# Altium PCB schematic.PcbDoc
Units mil, origin at the board's own origin, x right, y up, seen from the top; angles counter-clockwise.
Board outline 2165.35 x 2362.2 mil, 2 copper layers (Top, Bottom); 42 components, 51 nets, 206 pads, 238 vias.
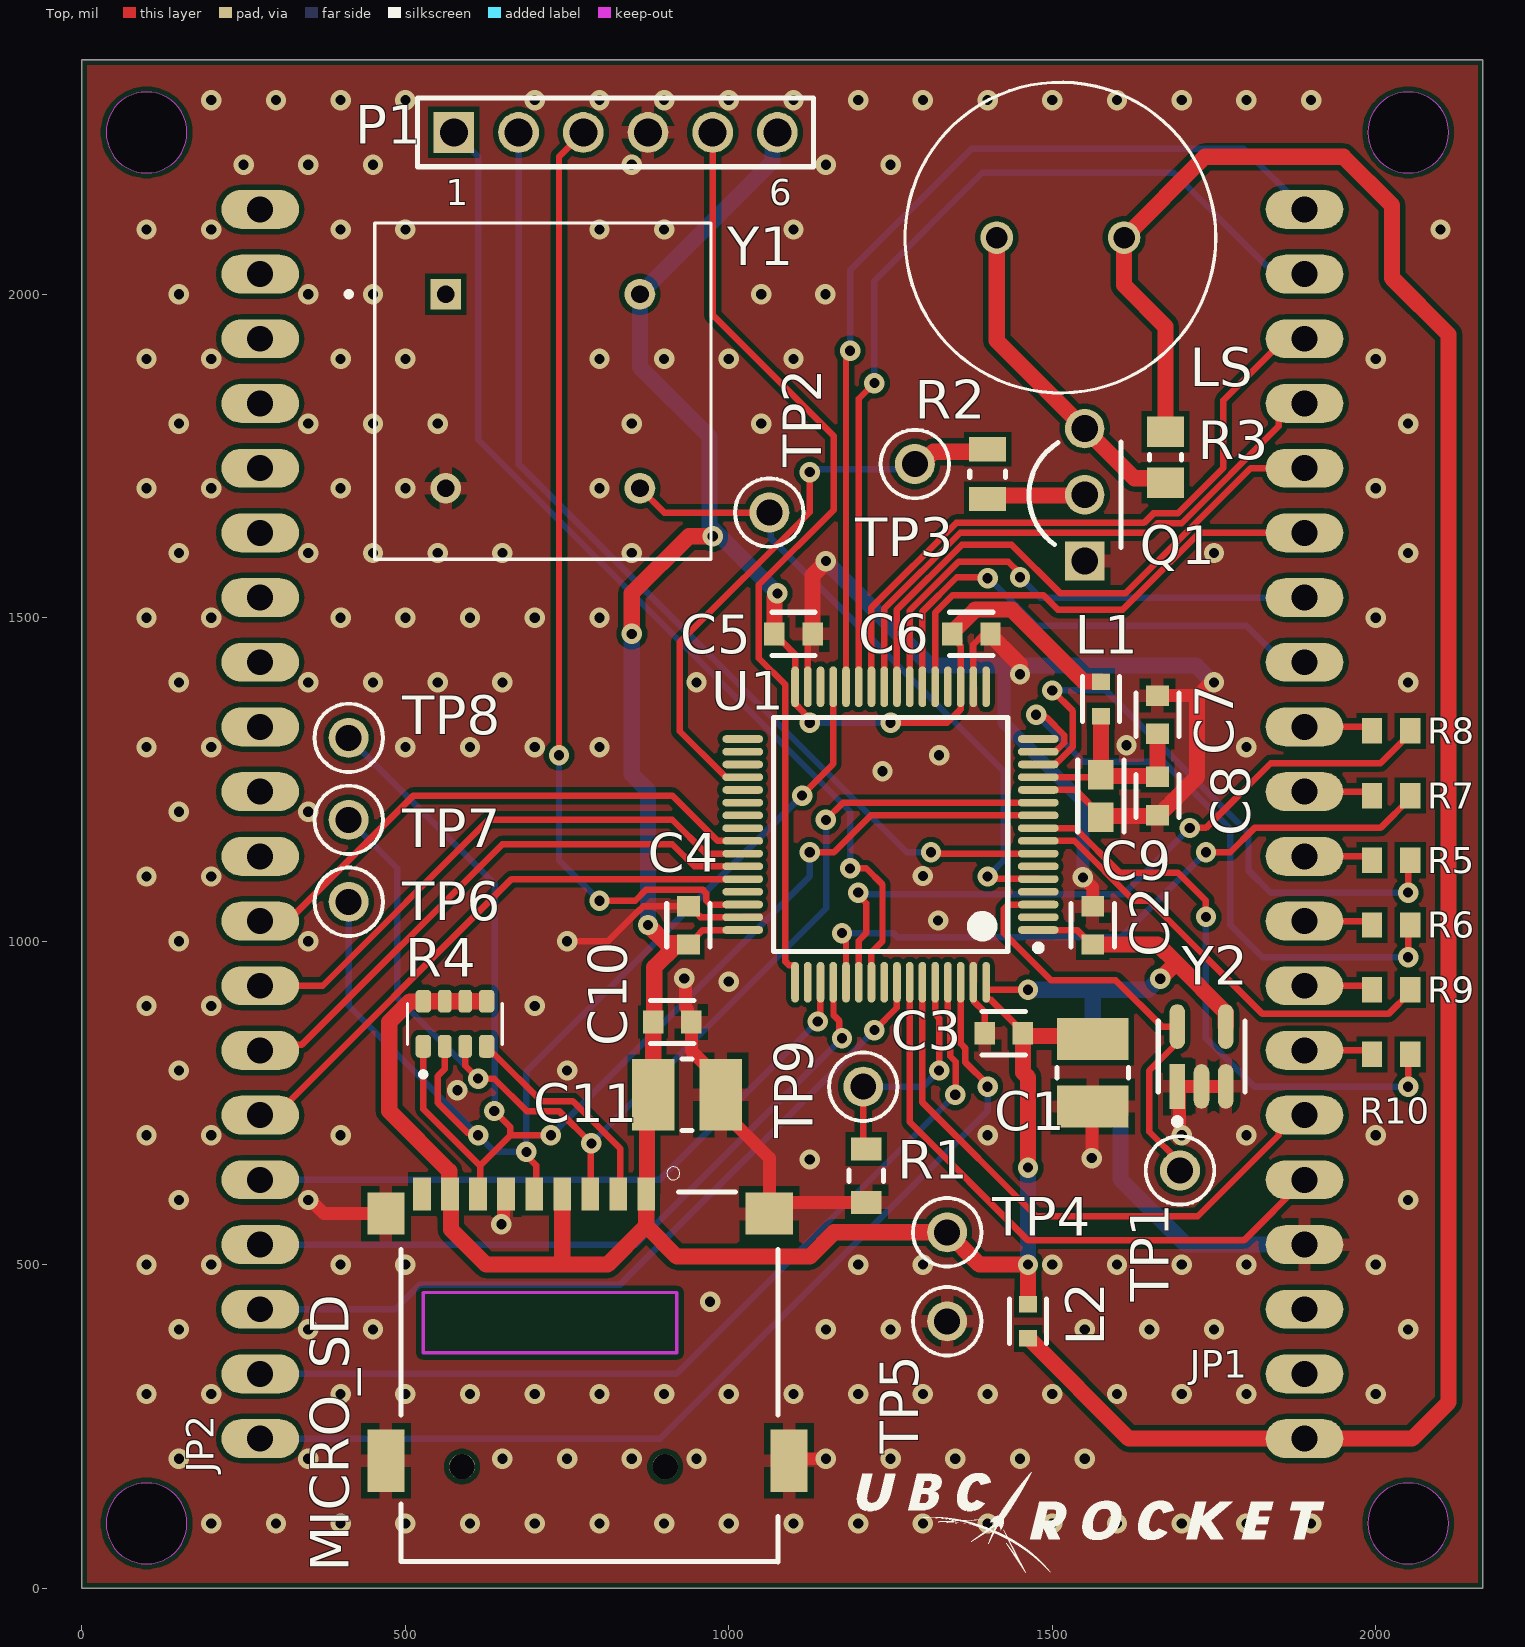
[diagram p0: Top view]
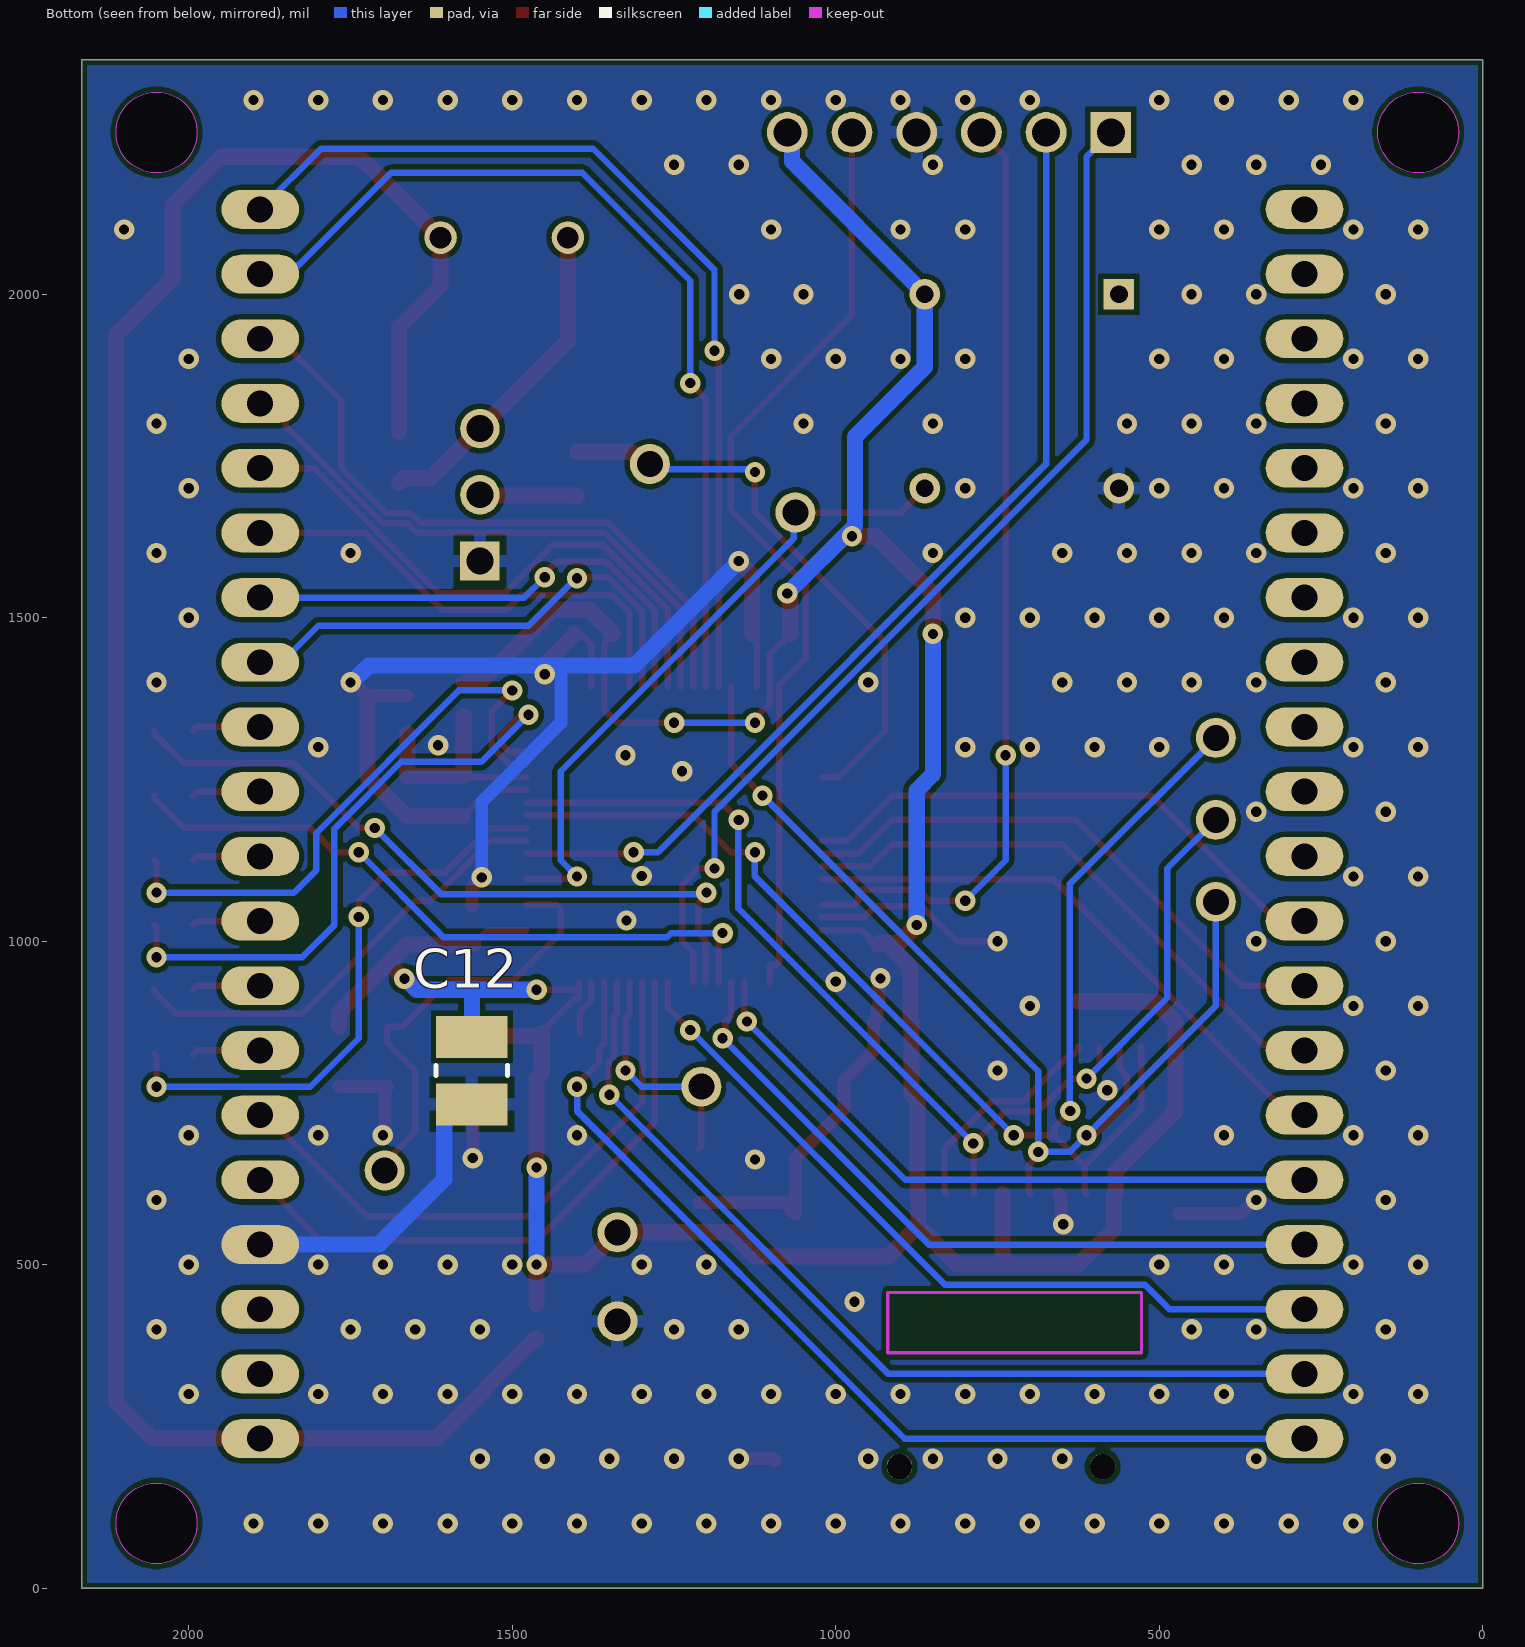
[diagram p1: Bottom view, seen from below]
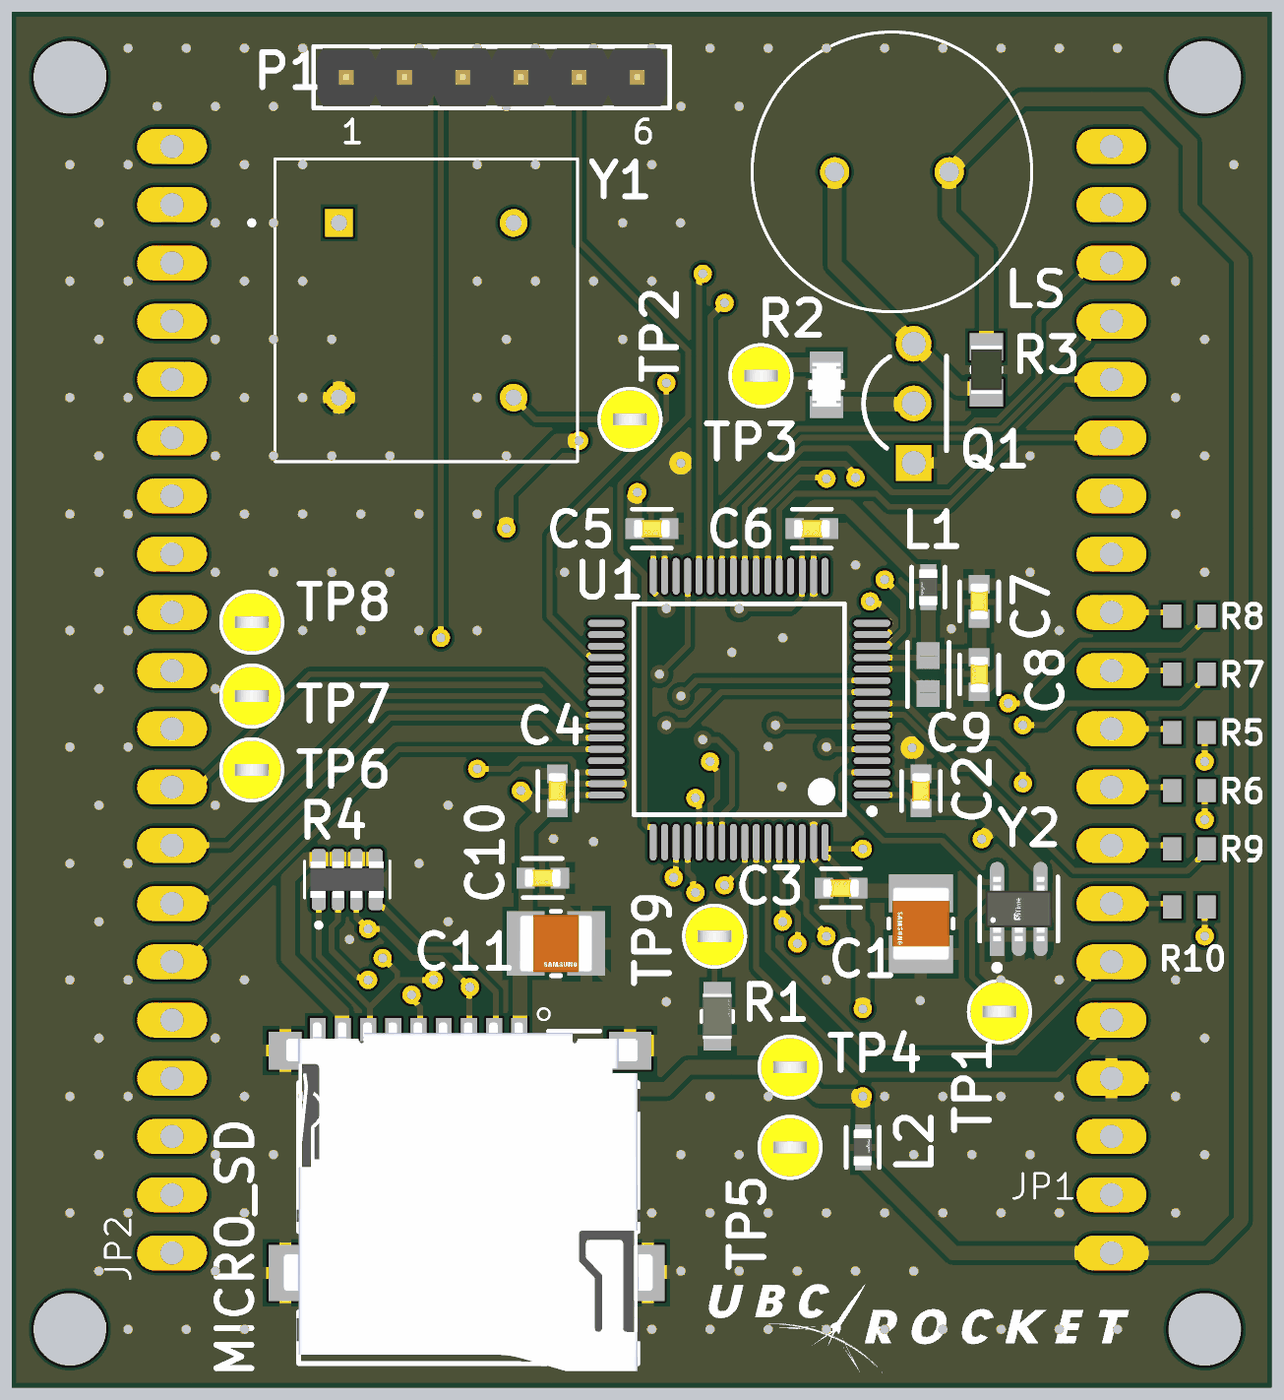
[diagram p2: 3D render of the assembled board from above, using the file's embedded part models]

## Layer stack, top to bottom
Top Solder: solder mask 0.4, Solder Resist, Dk 3.5
Top: signal copper 1.378
Dielectric 1: dielectric 12.6, FR-4, Dk 4.8
Bottom: signal copper 1.378
Bottom Solder: solder mask 0.4, Solder Resist, Dk 3.5

## Board outline
0,2362.2 0,0 2165.35,0 2165.35,2362.2
cut-out: 2050,2187.5 ccw(c2050,2250) 2112.5,2250 ccw(c2050,2250) 2050,2312.5 ccw(c2050,2250) 1987.5,2250 ccw(c2050,2250)
cut-out: 100,2187.5 ccw(c100,2250) 162.5,2250 ccw(c100,2250) 100,2312.5 ccw(c100,2250) 37.5,2250 ccw(c100,2250)
cut-out: 100,37.5 ccw(c100,100) 162.5,100 ccw(c100,100) 100,162.5 ccw(c100,100) 37.5,100 ccw(c100,100)
cut-out: 2050,37.5 ccw(c2050,100) 2112.5,100 ccw(c2050,100) 2050,162.5 ccw(c2050,100) 1987.5,100 ccw(c2050,100)

## Design rules (kind name [scope] priority, off if disabled: settings)
BoardOutlineClearance [All] p1: gap=7.87 ignorepadtopadclearanceinfootprint=FALSE except(15.75: Arc-SplitBarrior Arc-SplitContinuation Track-SplitBarrior Track-SplitContinuation SMDPad-SplitBarrior SMDPad-SplitContinuation THPad-SplitBarrior THPad-SplitContinuation Via-SplitBarrior Via-SplitContinuation Fill-SplitBarrior Fill-SplitContinuation Poly-SplitBarrior Poly-SplitContinuation Region-SplitBarrior Region-SplitContinuation Text-SplitBarrior Text-SplitContinuation)
Clearance "Clearance Bottom Layer" [OnLayer('Bottom Layer')] p1: gap=8 ignorepadtopadclearanceinfootprint=TRUE except(10: Arc-Text Track-Text SMDPad-Text THPad-Text Via-Text Fill-Text Poly-Text Region-Text Text-Text)
Clearance "Clearance Top Layer" [OnLayer('Top Layer')] p2: gap=8 ignorepadtopadclearanceinfootprint=TRUE except(10: Arc-Text Track-Text SMDPad-Text THPad-Text Via-Text Fill-Text Poly-Text Region-Text Text-Text)
Clearance [All] p3: gap=7.87 ignorepadtopadclearanceinfootprint=FALSE except(3.5: Arc-Arc Arc-Track Arc-SMDPad Track-Track Track-SMDPad SMDPad-SMDPad; 5: Arc-Via Track-Via SMDPad-Via THPad-Via Via-Via; 10: Arc-Text Track-Text SMDPad-Text THPad-Text Via-Text Fill-Text Poly-Text Region-Text Text-Text)
HoleSize [All] p1: absolutevalues=TRUE maxlimit=248.03 minlimit=7.87 maxpercent=80.000 minpercent=20.000
MinimumAnnularRing [All] p1: minimumring=3
MinimumSolderMaskSliver [All] p1: minsoldermaskwidth=3.94
PolygonConnect PolygonConnect_1 [All] p1: thpad.connectstyle=Relief thpad.reliefconductorwidth=20 thpad.reliefentries=4 thpad.polygonreliefangle="90 Angle" thpad.airgapwidth=10 smdpad.connectstyle=Relief smdpad.reliefconductorwidth=20 smdpad.reliefentries=4 smdpad.polygonreliefangle="90 Angle" smdpad.airgapwidth=10 via.connectstyle=Direct via.reliefconductorwidth=20 via.reliefentries=4 via.polygonreliefangle="90 Angle" via.airgapwidth=10
RoutingCorners [All] p1: cornerstyle=Round minsetback=100 maxsetback=100
RoutingVias [All] p1: holewidth=19.68 width=39.37 viastyle="Through Hole" minholewidth=7.87 minwidth=17.72 maxholewidth=39.37 maxwidth=78.74
SilkToSilkClearance [All] p1: silktosilkclearance=3.94
SilkToSolderMaskClearance [IsPad] p1: minsilkscreentomaskgap=3.94 clearancetoexposedcopper=TRUE
SolderMaskExpansion [All] p1: expansion=4 istentingtop=FALSE
Width [All] p1: maxlimit=100 minlimit=3.5 preferedwidth=15
25 further rules are at their usual default settings.

## Classes and differential pairs
component class microSD: C10 C11 MICRO_SD R4 TP6 TP7 TP8
component class schematic: JP1 JP2 L2
component class MCU: 30mil C1 C2 C3 C4 C5 C6 C7 C8 C9 C12 L1 LS P1 Q1 R1 R2 R3 R5 R6 R7 R8 R9 R10 TP1 TP2 TP3 TP4 TP5 TP9 U1 Y1 Y2

## Components (designator, comment, footprint, x,y, rotation, side; value= is the part's Value field where it differs from the comment)
C1 "CL32B106KAJNNNE" FP-CL32-IPC_B 1562.5,796.6 r270 top
C2 "CC0603KRX7R9BB104" FP-CC0603-DA-MFG 1562.5,1024.42 r90 top value="100 nF"
C3 "CC0603KRX7R9BB104" FP-CC0603-DA-MFG 1425,857.69 r180 top value="100 nF"
C4 "CC0603KRX7R9BB104" FP-CC0603-DA-MFG 937.5,1024.42 r90 top value="100 nF"
C5 "CC0603KRX7R9BB104" FP-CC0603-DA-MFG 1100,1475 r0 top value="100 nF"
C6 "CC0603KRX7R9BB104" FP-CC0603-DA-MFG 1375,1475 r0 top value="100 nF"
C7 "CC0603KRX7R9BB104" FP-CC0603-DA-MFG 1662.5,1350 r90 top value="100 nF"
C8 "CC0603KRX7R9BB103" FP-CC0603-DA-MFG 1662.5,1224.42 r270 top value="10 nF"
C9 "CL10A105KO8NNNC" FP-CL10-IPC_A 1575,1224.42 r270 top
C10 "CC0603KRX7R9BB104" FP-CC0603-DA-MFG 912.5,875 r0 top value="100 nF"
C11 "CL32B106KAJNNNE" FP-CL32-IPC_B 935.33,762.5 r0 top
C12 "CL32B106KAJNNNE" FP-CL32-IPC_B 1562.5,800 r270 bottom
JP1 "PINHD-1X20" 1X20 1889.76,1181.1 r90 top
JP2 "PINHD-1X20" 1X20 275.59,1181.1 r90 top
L1 "BLM18EG601SN1D" FP-BLM18-0_15-t0_8-MFG 1575,1374.42 r270 top
L2 "BLM18EG601SN1D" FP-BLM18-0_15-t0_8-MFG 1462.5,412.5 r90 top
LS "PS1240P02BT" XDCR_PS1240P02BT 1512.5,2087.5 r0 top
MICRO_SD "TF-01A" TF-01A 784.56,326.77 r0 top
P1 "61300611121" 61300611121 825,2250 r0 top
Q1 "PN2222ATF" FAIR-TO-92-3 1550,1689.98 r90 top
R1 "AC0805FR-0710KL" FP-AC0805-MFG 1212.5,637.5 r90 top value=10KΩ
R2 "CRCW0805220RFKEA" FP-CRCW0805-e3-MFG 1400,1721.95 r270 top
R3 "RC0805FR-071KL" RESC2013X60X35ML10T20 1675,1747.84 r90 top
R4 "YC164-JR-0747KL" RESCAXE80P320X160X70-8N 576.67,872.34 r90 top
R5 "RC0603JR-070RL" RESC1608X55X25ML10T15 2023.67,1125 r0 top
R6 "RC0603JR-070RL" RESC1608X55X25ML10T15 2023.67,1025 r0 top
R7 "RC0603JR-070RL" RESC1608X55X25ML10T15 2023.67,1225 r0 top
R8 "RC0603JR-070RL" RESC1608X55X25ML10T15 2023.67,1325 r180 top
R9 "RC0603JR-070RL" RESC1608X55X25ML10T15 2023.67,925 r0 top
R10 "RC0603JR-070RL" RESC1608X55X25ML10T15 2023.67,825 r0 top
TP1 "5004" FP-5004-MFG 1697.32,645.57 r0 top
TP2 "5004" FP-5004-MFG 1062.5,1662.5 r0 top
TP3 "5004" FP-5004-MFG 1287.5,1737.5 r0 top
TP4 "5004" FP-5004-MFG 1337.5,550 r0 top
TP5 "5004" FP-5004-MFG 1337.5,412.5 r0 top
TP6 "5004" FP-5004-MFG 412.5,1060.84 r0 top
TP7 "5004" FP-5004-MFG 412.5,1187.5 r0 top
TP8 "5004" FP-5004-MFG 412.5,1314.16 r0 top
TP9 "5004" FP-5004-MFG 1207.77,775 r0 top
U1 "STM32L476RCT6" STM-LQFP64_L 1250,1164.86 r180 top
Y1 "ACHL-8.000MHZ-EK" XTAL_ACHL-8.000MHZ-EK 712.5,1850 r0 top
Y2 "SIT1630AI-S4-DCC-32.768E" FP-SiT1630-S-IPC_A 1730.6,821.76 r90 top

## Footprints (in the part's own frame and the unit in brackets; to place one, negate y for a bottom-side part, rotate by r counter-clockwise, add the part's x,y. Pads: shape width x height; smd on the part's side, far side on the other; paste and mask are expansions set on the pad)
1X20 [mil] "1X20"
  oval 60x120 hole 40: 1(-950,0) 2(-850,0) 3(-750,0) 4(-650,0) 5(-550,0) 6(-450,0) 7(-350,0) 8(-250,0) 9(-150,0) 10(-50,0) 11(50,0) 12(150,0) 13(250,0) 14(350,0) 15(450,0) 16(550,0) 17(650,0) 18(750,0) 19(850,0) 20(950,0)
61300611121 [mm] "Pin Header, pitch 2.54 mm, THT, Vertical, single row, 6p"
  rect 1.6x1.6 hole 1.1: 1(-6.35,0)
  round 1.6 hole 1.1: 2(-3.81,0) 3(-1.27,0) 4(1.27,0) 5(3.81,0) 6(6.35,0)
  silkscreen extent -7.77,-1.35 7.77,1.35, body extent -7.62,-1.27 7.62,1.27, height 8.57
FAIR-TO-92-3 [mm] "TO, 3-Leads, Body Dia 4.79mm, Pitch 2.6mm"
  rect 1.55x1.55 hole 1.05: 1(-2.6,0)
  round 1.55 hole 1.05: 2(0,0) 3(2.6,0)
  silkscreen extent -2.07,-1.43 2.07,2.19, body extent -2.4,-1.47 2.4,2.2, height 8.49
FP-5004-MFG [mm]
  round 1.57 hole 1.02 paste-1000 mask+0: 1(0,0)
  silkscreen extent -1.35,-1.34 1.35,1.34, body extent -1.45,-1.45 1.45,1.45, height 0.25
FP-AC0805-MFG [mm]
  rect 0.9x1.2 smd paste+0 mask+0: 1(-1.05,0) 2(1.05,0)
  silkscreen extent -0.23,-0.67 0.23,0.67, body extent -1.6,-0.77 1.6,0.77, height 0.25
FP-BLM18-0_15-t0_8-MFG [mm]
  rect 0.65x0.7 smd paste+0 mask+0: 1(-0.675,0) 2(0.675,0)
  silkscreen extent -0.87,-0.72 0.87,0.72, body extent -1.1,-0.58 1.1,0.58, height 0.25
FP-CC0603-DA-MFG [mm]
  rect 0.8x0.9 smd paste+0 mask+0: 1(-0.75,0) 2(0.75,0)
  silkscreen extent -0.85,-0.85 0.85,0.85, body extent -1.35,-0.75 1.35,0.75, height 0.25
FP-CL10-IPC_A [mil]
  rect 45.6x39.85 smd paste+0 mask+0: 1(-32.56,0) 2(32.56,0)
  silkscreen extent -55,-36 55,36, body extent -75,-40 75,40, height 10
FP-CL32-IPC_B [mil]
  rect 65.06x110.4 smd paste+0 mask+0: 1(-52.17,0) 2(52.18,0)
  silkscreen extent -8,-55 8,55, body extent -95,-65 95,65, height 10
FP-CRCW0805-e3-MFG [mm]
  rect 0.95x1.45 smd paste+0 mask+0: 1(-0.975,0) 2(0.975,0)
  silkscreen extent -0.13,-0.7 0.13,0.7, body extent -1.55,-0.82 1.55,0.82, height 0.25
FP-SiT1630-S-IPC_A [mm]
  rect 1.755x0.612 smd paste+0 mask+0: 1(-1.175,0.95)
  rrect100% 1.755x0.612 smd paste+0 mask+0: 2(-1.175,0) 3(-1.175,-0.95) 4(1.175,-0.95) 5(1.175,0.95)
  silkscreen extent -2.68,-1.7 1.4,1.7, body extent -2.55,-1.95 2.55,1.95, height 0.25
RESC1608X55X25ML10T15 [mm] "Chip Resistor, 2-Leads, Body 1.60x0.80mm, IPC Low Density"
  rect 0.8x1 smd: 1(-0.75,0) 2(0.75,0)
  body extent -0.85,-0.45 0.85,0.45, height 0.55
RESC2013X60X35ML10T20 [mm] "Chip Resistor, 2-Leads, Body 2.1x1.35mm, IPC Low Density"
  rect 1.2x1.45 smd: 1(-1,0) 2(1,0)
  silkscreen extent -0.1,-0.63 0.1,0.63, body extent -1.05,-0.68 1.05,0.67, height 0.6
RESCAXE80P320X160X70-8N [mm]
  rrect50% 0.9x0.61 smd: 1(-0.885,1.24) 4(-0.885,-1.24) 5(0.885,-1.24) 8(0.885,1.24)
  rrect50% 0.9x0.53 smd: 2(-0.885,0.4) 3(-0.885,-0.4) 6(0.885,-0.4) 7(0.885,0.4)
  silkscreen extent -2.08,-1.86 0.8,1.86, body extent -0.8,-1.6 0.8,1.6, height 0.7
STM-LQFP64_L [mm] "QFP, 64-Leads, Body 10x10mm, Pitch 0.5mm, IPC High Density"
  oval 1.6x0.3 smd: 1(-5.8,3.75) 2(-5.8,3.25) 3(-5.8,2.75) 4(-5.8,2.25) 5(-5.8,1.75) 6(-5.8,1.25) 7(-5.8,0.75) 8(-5.8,0.25) 9(-5.8,-0.25) 10(-5.8,-0.75) 11(-5.8,-1.25) 12(-5.8,-1.75) 13(-5.8,-2.25) 14(-5.8,-2.75) 15(-5.8,-3.25) 16(-5.8,-3.75) 33(5.8,-3.75) 34(5.8,-3.25) 35(5.8,-2.75) 36(5.8,-2.25) 37(5.8,-1.75) 38(5.8,-1.25) 39(5.8,-0.75) 40(5.8,-0.25) 41(5.8,0.25) 42(5.8,0.75) 43(5.8,1.25) 44(5.8,1.75) 45(5.8,2.25) 46(5.8,2.75) 47(5.8,3.25) 48(5.8,3.75)
  oval 0.3x1.6 smd: 17(-3.75,-5.8) 18(-3.25,-5.8) 19(-2.75,-5.8) 20(-2.25,-5.8) 21(-1.75,-5.8) 22(-1.25,-5.8) 23(-0.75,-5.8) 24(-0.25,-5.8) 25(0.25,-5.8) 26(0.75,-5.8) 27(1.25,-5.8) 28(1.75,-5.8) 29(2.25,-5.8) 30(2.75,-5.8) 31(3.25,-5.8) 32(3.75,-5.8) 49(3.75,5.8) 50(3.25,5.8) 51(2.75,5.8) 52(2.25,5.8) 53(1.75,5.8) 54(1.25,5.8) 55(0.75,5.8) 56(0.25,5.8) 57(-0.25,5.8) 58(-0.75,5.8) 59(-1.25,5.8) 60(-1.75,5.8) 61(-2.25,5.8) 62(-2.75,5.8) 63(-3.25,5.8) 64(-3.75,5.8)
  silkscreen extent -5.93,-4.6 4.6,4.6, body extent -5,-5 5,5, height 1.6
TF-01A [mm]
  rect 0.7x1.3 smd: 1(2.23,7.174) 2(1.13,7.174) 3(0.03,7.174) 4(-1.07,7.174) 5(-2.17,7.174) 6(-3.27,7.174) 7(-4.37,7.174) 8(-5.47,7.174) CD1(-6.57,7.174)
  rect 1.448x1.651 smd: MP1(-7.989,6.4)
  rect 1.448x2.438 smd: MP2(-7.989,-3.3) MP3(7.836,-3.3)
  rect 1.854x1.651 smd: MP4(7.061,6.4)
  round 1 hole 1 unplated: ""(-5.004,-3.531) ""(2.972,-3.531)
  Keep-Out Layer lines w0.127: -6.528,0.94 3.429,0.94 3.429,3.302 -6.528,3.302 -6.528,0.94
  silkscreen extent -7.4,-7.26 7.4,8.24, body extent -8.05,-7.58 8.05,7.62, height 2
XDCR_PS1240P02BT [mm]
  round 1.28 hole 0.85: 1(-2.5,0) 2(2.5,0)
  silkscreen extent -6.1,-6.1 6.1,6.1
XTAL_ACHL-8.000MHZ-EK [mm]
  rect 1.208x1.208 hole 0.7: 1(-3.81,3.81)
  round 1.208 hole 0.7: 4(-3.81,-3.81) 5(3.81,-3.81) 8(3.81,3.81)
  silkscreen extent -7.72,-6.6 6.6,6.6

## Part data
C1 C11 C12: library part CMP-13271-001383-1, "Cap Ceramic 10uF 25V X7R ±10% SMD 1210 +125°C Embossed T/R", Capacitance=10uF, Case Code (Imperial)=1210, Case Code (Metric)=3225, Dielectric=X7R, Max Operating Temperature=125°C, Min Operating Temperature=-55°C, Package Quantity=1000, Tolerance=10%, Voltage=25V, Case/Package=1210, Contact Plating=Tin, Depth=2.5mm, Height=2.5mm, Length=3.2mm, Material=Ceramic, Mount="Surface Mount", Packaging="Tape and Reel", Radiation Hardening=No, Thickness=0.106inch, Voltage Rating=25V, Width=0.098inch
C2 C3 C4 C5 C6 C7 C10: library part CMP-2100-03601-2, "CAP CER 0.1UF 50V X7R 0603", Capacitance="100 nF", Manufacturer=YAGEO, Package=CC0603-DA, Temperature="-55°C to +125°C", Temperature Characteristic=X7R, Temperature Coefficient=15%, Temperature Range High=+125°C, Temperature Range Low=-55°C, Tolerance=0.1, Voltage="50 V", Automotive=No, Category=Cap, ComponentLink2Description=Datasheet, ComponentLink2URL=http://www.yageo.com/documents/recent/UPY-GPHC_X7R_6.3V-to-50V_18.pdf, Device Class L1="Passive Components", Device Class L2=Capacitors, Device Class L3="Ceramic Capacitors", Digikey Description="CAP CER 0.1UF 50V X7R 0603", Footprint Url=http://www.yageo.com/exep/pages/download/literatures/UPY-C_GEN_24.pdf, Height=0.9mm, Lead Free=Yes, Manufacturer Part Number=CC0603KRX7R9BB104, Material=Ceramic, Mouser Description="Multilayer Ceramic Capacitor, CC Series, 0.1 - F, - 10%, X7R, 50 V, 0603 [1608 Metric]", Octopart=https://octopart.com/cc0603krx7r9bb104-yageo-42244635, RoHS=TRUE, Voltage Rating="50 V"
C8: library part CMP-2100-03600-2, "CAP CER 10000PF 50V X7R 0603", Capacitance="10 nF", Manufacturer=YAGEO, Package=CC0603-DA, Temperature="-55°C to +125°C", Temperature Characteristic=X7R, Temperature Coefficient=15%, Temperature Range High=+125°C, Temperature Range Low=-55°C, Tolerance=0.1, Voltage="50 V", Automotive=No, Category=Cap, ComponentLink2Description=Datasheet, ComponentLink2URL=http://www.yageo.com/documents/recent/UPY-GPHC_X7R_6.3V-to-50V_18.pdf, Device Class L1="Passive Components", Device Class L2=Capacitors, Device Class L3="Ceramic Capacitors", Digikey Description="CAP CER 10000PF 50V X7R 0603", Footprint Url=http://www.yageo.com/exep/pages/download/literatures/UPY-C_GEN_24.pdf, Height=0.9mm, Lead Free=Yes, Manufacturer Part Number=CC0603KRX7R9BB103, Material=Ceramic, Mouser Description="Multilayer Ceramic Capacitor, CC Series, 0.01 - F, - 10%, X7R, 50 V, 0603 [1608 Metric]", Octopart=https://octopart.com/cc0603krx7r9bb103-yageo-192938, RoHS=TRUE, Voltage Rating="50 V"
C9: library part CMP-13271-001457-1, "Cap Ceramic 1uF 16V X5R ±10% Pad SMD 0603 +85°C T/R", Capacitance=1uF, Case Code (Imperial)=0603, Case Code (Metric)=1608, Dielectric=X5R, Max Operating Temperature=85°C, Min Operating Temperature=-55°C, Package Quantity=1, Tolerance=10%, Voltage=16V, Case/Package=0603, Contact Plating=Tin, Depth=0.8mm, Height=0.8mm, Lead Free="Lead Free", Length=1.6mm, Material=Ceramic, Mount="Surface Mount", Packaging="Tape and Reel", Radiation Hardening=No, Thickness=0.035inch, Voltage Rating=16V, Voltage Rating (DC)=16V, Width=0.031inch
JP1 JP2: "PIN HEADER", DeviceSetName=PINHD-1X20, GateName_1=A, LibraryName=adafruit, SymbolName_1=PINHD20
L1 L2: library part CMP-0686-00354-3, "Chip Ferrite Bead, 0603, 600Ω @ 100MHz, 0.35Ω, 25%, 500mA", Case Code (Imperial)=0603, Case Code (Metric)=1608, Current Rating=500mA, DC Resistance (DCR)=350mR, Frequency=100MHz, Manufacturer Series=BLM18E, Max Operating Temperature=125°C, Min Operating Temperature=-55°C, Package Quantity=1, Tolerance=25%, Case/Package=0603, Contact Plating=Tin, Core Material=Ferrite, DC Current=500mA, DC Resistance-Max=350mR, Depth=0.8mm, Height=0.8mm, Impedance=600R, Lead Free="Lead Free", Length=1.6mm, Material=Steel, Max Current Rating=500mA, Max DC Current=500mA, Military Standard=Not, Number of Circuits=1, Number of Functions=1, Number of Lines=1, Number of Pins=2, Packaging="Tape and Reel", Radiation Hardening=No, REACH SVHC="No SVHC", Resistance=350mR, RoHS Compliant=Yes, Series=BLM18E, Shielding=Unshielded, Terminal Finish=Tin, Termination=SMD/SMT, Test Frequency=100MHz, Width=0.8mm
LS: "Buzzers Transducer, Externally Driven Piezo 3V 4kHz 60dB @ 3V, 10cm Through Hole PC Pins", Package="2020 TDK", Availability=Unavailable, MF=TDK, MP=PS1240P02BT, Price=None, SnapEDA_Link=https://www.snapeda.com/parts/PS1240P02BT/TDK/view-part/53420/?ref=snap
MICRO_SD: "Standard Card Edge Connectors", Package=Package, Availability="Not in stock", Check_prices=https://www.snapeda.com/parts/TF-01A/HRO+Electronics+Co.%252C+Ltd./view-part/?ref=eda, MF="HRO Electronics Co., Ltd.", MP=TF-01A, Price=None, SnapEDA_Link=https://www.snapeda.com/parts/TF-01A/HRO+Electronics+Co.%252C+Ltd./view-part/?ref=snap
P1: library part CMP-1502-01070-1, "THT Vertical Pin Header WR-PHD, Pitch 2.54 mm, Single Row, 6 pins", Contact Resistance=20mOhm, Manufacturer="Wurth Elektronik", Operating Temperature=-40to105degC, Rated Current=3A, Withstanding Voltage=500VAC, Working Voltage=250VAC, Datasheet URL=https://katalog.we-online.de/em/datasheet/6130xx11121.pdf, Gender=Male, Manufacturer URL=http://www.we-online.de, Mounting Technology=THT, Orientation=Vertical, Package Reference=61300611121, Packaging=Bag, Part Number=61300611121, Pin Number=6, Pitch=2.54mm, Publisher=WurthElektronik, Row Number=Single
Q1: library part CMP-2000-06911-1, "NPN General-Purpose Amplifier, 40 V, -55 to 150 degC, 3-Pin TO-92, RoHS, Tape and Reel", Collector- Base Voltage VCBO=75V, Collector- Emitter Voltage VCEO Max=40V, Collector-Emitter Saturation Voltage=1V, DC Current Gain hFE Max=300, Emitter- Base Voltage VEBO=6V, Manufacturer=FairchildSemiconductor, Maximum DC Collector Current=1A, Maximum Operating Temperature=+150C, Maximum Power Dissipation=625mW, Minimum Operating Temperature=-55C, Package / Case=TO-92-3KinkedLead, Package Description="3-Pin Transistor Outline Package, Body Dia 4.79 mm, Pitch 2.6 mm", Package Reference=TO-92, <PCN>=http://www.mouser.com/PCN/3.26.10LTBDFairchild.pdf, Brand=FairchildSemiconductor, Configuration=Single, Datasheet URL=https://www.fairchildsemi.com/datasheets/PN/PN2222A.pdf, Datasheet Version="Rev. 1.1.0, 07/2014", DC Collector/Base Gain hfe Min=100, Factory Pack Quantity=2000, Gain Bandwidth Product fT=300MHz, Manufacturer URL=https://www.fairchildsemi.com/, Mounting Style=ThroughHole, Mounting Technology=ThroughHole, Packaging=Reel, Product Category=BipolarTransistors-BJT, RoHS=Details, Series=PN2222, Transistor Polarity=NPN, Unit Weight=0.008466oz
R1: library part CMP-2001-04480-2, "RES SMD 10K OHM 1% 1/8W 0805", Manufacturer=Yageo, Package=AC0805, Power Rating=1/8W, Resistance=10KΩ, Temperature="-55°C to +155°C", Temperature Range High=+155°C, Temperature Range Low=-55°C, Tolerance=0.01, Voltage Rating=150V, Automotive=Yes, Automotive Grade="Grade 0", Category=Res, ComponentLink2Description=Datasheet, ComponentLink2URL=http://www.yageo.com/documents/recent/PYu-AC_51_RoHS_L_6.pdf, Composition="Thick Film", Device Class L1="Passive Components", Device Class L2=Resistors, Device Class L3="Chip SMD Resistors", Digikey Description="RES SMD 10K OHM 1% 1/8W 0805", Footprint Url=http://www.yageo.com/exep/pages/download/literatures/PYu-R_Mount_10.pdf, Height=0.6mm, Ipc Land Pattern Name=RESC200125X50, Lead Free=Yes, Manufacturer Part Number=AC0805FR-0710KL, Mouser Description="Res Thick Film 0805 10K Ohm 1% 0.125W(1/8W) ±100ppm/C Epoxy Pad SMD Automotive T/R", Octopart=https://octopart.com/ac0805fr-0710kl-yageo-21711112, RoHS=TRUE, Series=AC
R2: library part CMP-2001-03682-2, "RES Thick Film, 220Ω, 1%, 0.125W, 100ppm/°C, 0805", Case Code (Imperial)=0805, Case Code (Metric)=2012, Max Operating Temperature=155°C, Max Power Dissipation=125mW, Min Operating Temperature=-55°C, Package Quantity=10, Resistance=220R, Temperature Coefficient=100ppm/°C, Tolerance=1%, Voltage Rating=150V, Case/Package=0805, Composition="Thick Film", Contact Plating=Tin, Depth=1.25mm, Features="Automotive AEC-Q200", Height=0.45mm, Lead Free="Lead Free", Length=2mm, Military Standard=Not, Mount="Surface Mount", Number of Terminations=2, Packaging="Tape and Reel", Power Rating=125mW, Radiation Hardening=No, Termination=SMD/SMT, Voltage Rating (DC)=150V, Weight=0.000194oz, Width=0.049inch
R3: library part CMP-2100-03671-1, "Chip Resistor, 1 KOhm, +/- 1%, 125 mW, -55 to 155 degC, 0805 (2012 Metric), RoHS, Tape and Reel", Case Code (Imperial)=0805, Case Code (Metric)=2012, Manufacturer=Yageo, Max Operating Temperature=155degC, Max Power Dissipation=125mW, Min Operating Temperature=-55degC, Package Description="2-Pin Surface Mounted Device, Body 2 x 1.25 mm", Package Quantity=1, Resistance=1KOhm, Temperature Coefficient=100ppm/degreesC, Tolerance=1%, Voltage Rating=150V, Case/Package=0805, Composition=ThickFilm, Datasheet URL=http://www.yageo.com/NewPortal/yageodocoutput?fileName=/pdf/R-Chip/PYu-RC_Group_51_RoHS_L_5.pdf, Datasheet Version="Rev. 5, 10/2016", Depth=1.25mm, Height=0.024inch, Lead Free=LeadFree, Length=0.079inch, Manufacturer URL=http://www.yageo.com/, Military Standard=Not, Number of Pins=2, Number of Terminations=2, Package Reference=0805, Packaging=TapeandReel, Power Rating=125mW, REACH SVHC=Unknown, RoHSCompliant=true, Termination=SMD/SMT, Voltage Rating (DC)=150V, Width=0.049inch
R4: "47k Ohm Â±5% 62.5mW Power Per Element Isolated 4 Resistor Network/Array Â±200ppm/Â°C 1206 (3216 Metric), Convex, Long Side Terminals", Package="1206 Yageo", Check_prices=https://www.snapeda.com/parts/YC164-JR-0747KL/Yageo/view-part/?ref=eda, MF=Yageo, MP=YC164-JR-0747KL, SnapEDA_Link=https://www.snapeda.com/parts/YC164-JR-0747KL/Yageo/view-part/?ref=snap
R5 R6 R7 R8 R9 R10: library part CMP-2100-03667-1, "Chip Resistor, 0 Ohm, +/- 5%, 0.1 W, -55 to 155 degC, 0603 (1608 Metric), RoHS, Tape and Reel", Case Code (Imperial)=0603, Case Code (Metric)=1608, Manufacturer=Yageo, Max Operating Temperature=155degC, Min Operating Temperature=-55degC, Package Description="2-Pin Surface Mount Device, Body 1.6 x 0.8 mm", Package Quantity=5000, Power Rating=100mW, Resistance=0mOhm, Temperature Coefficient=200ppm/degreesC, Tolerance=5%, Voltage Rating=50V, Case/Package=0603, Composition=ThickFilm, Contact Plating=Tin, Datasheet URL=http://www.yageo.com/NewPortal/yageodocoutput?fileName=/pdf/R-Chip/PYu-RC_Group_51_RoHS_L_5.pdf, Datasheet Version="Rev. 5, 10/2016", Depth=0.8mm, Height=0.45mm, Lead Free=LeadFree, Length=1.6mm, Manufacturer URL=http://www.yageo.com/, Military Standard=Not, Number of Pins=2, Package Reference=0603, Packaging=TapeandReel, Radiation Hardening=No, REACH SVHC=NoSVHC, RoHSCompliant=true, Termination=SMD/SMT, Voltage Rating (DC)=50V, Width=0.8mm
TP1 TP2 TP3 TP4 TP5 TP6 TP7 TP8 TP9: library part CMP-2000-05575-2, "PC TEST POINT MINIATURE YELLOW", Manufacturer=Keystone, Automotive=No, Category=Conn, ComponentLink2Description=Datasheet, ComponentLink2URL=https://www.keyelco.com/product-pdf.cfm?p=1313, Contact Material=Silver, Device Class L1=Connectors, Device Class L2=unset, Device Class L3=unset, Digikey Description="PC TEST POINT MINIATURE YELLOW", Height=4.72mm, Is Female=yes, Lead Free=Yes, Manufacturer Part Number=5004, Mouser Description="TEST POINT PC MINI .040\"D YELLOW", Number Of Contacts=1, Octopart=https://octopart.com/5004-keystone-28591, Package=5004, RoHS=TRUE
U1: library part CMP-1655-00010-2, "Ultra-Low-Power ARM Cortex-M4 32-bit MCU+FPU, 256 KB Flash, 128 KB Internal RAM, 51 I/Os, 64-Pin LQFP, -40 to 85 degC, Tray", I/Os (High Current)=51, Manufacturer=STMicroelectronics, Operating Frequency(F) (Processor speed) (MHz)=80, Package Description="64-Pin Low-profile Quad Flat Package, Body 10 x 10 mm, Pitch 0.5 mm", Package Reference=LQFP64, Supply Voltage(Vcc) min (V)=1.71, ComponentLink1Description="Manufacturer URL", ComponentLink1URL=http://www.st.com/, ComponentLink2Description=Datasheet, ComponentLink2URL=http://www.st.com/st-web-ui/static/active/en/resource/technical/document/datasheet/DM00108832.pdf, Core="ARM Cortex-M4", D/A Converter=2, DatasheetVersion="Rev. 4", FLASH Size (Prog) (kB)=256, Internal RAM Size (kB)=128, Mounting Technology="Surface Mount", Packing=Tray, PartNumber=STM32L476RCT6
Y1: Package=None, Availability=Unavailable, MP=ACHL-8.000MHZ-EK, Price=None
Y2: library part CMP-25159-260193-1, "MEMS OSC XO 32.7680KHZ LVCMOS", RoHS Compliant=Yes

## Free pads (board coordinates)
  round 125 hole 125 unplated: MH1(100,100) MH2(2050,100) MH3(2050,2250) MH4(100,2250)

## Via types
v1: diameter 31.5, hole 15.75, Top to Bottom, tented both sides, 199 vias
v2: diameter 31.5, hole 15.75, Top to Bottom, 39 vias

## Nets (pads, with @x,y where several pads share a name; then routed paths per layer and width w, separated by ;. In a path a pad name is that pad's centre, name@x,y a point inside that pad or via, vN(x,y) a via of type N, cw(c..) or ccw(c..) an arc to the next point about the centre after c; other vN are vias at no path point)
3V3: JP1.1 L2.1 LS.2 R3.2 | length 3447.5
  Top w25: L2.1 1463.48,385.93 1618.31,231.1 JP1.1 2056.1,231.1 2112.5,287.5 2112.5,1937.5 2025,2025 2025,2137.5 1950,2212.5 1735.93,2212.5 LS.2 1610.93,2014.07 1675,1950 R3.2
3V3_2: JP1.2
BUZZ: R2.1 TP3.1 U1.36 | length 898.5
  Top w10: U1.36 995.57,1253.44 990.29,1258.72 990.1,1258.72 924.25,1324.57 924.25,1462.34 1125,1663.09 v2(1125,1725)
  Top w25: TP3.1 1297.46,1737.5 1316.36,1756.4 R2.1@1400,1756.4
  Bottom w10: v2(1125,1725) 1129.11,1729.11 1279.11,1729.11 TP3.1
CS1: JP1.16 U1.24 | length 901.9
  Top w10: U1.24 1259.84,1512.54 1359.81,1612.5 1437.5,1612.5 1512.5,1537.5 1612.76,1537.5 1806.36,1731.1 JP1.16
CS2: JP1.17 U1.25 | length 908.7
  Top w10: U1.25 1240.16,1514.06 1357.53,1631.44 1647.78,1631.44 1662.44,1646.1 1700.15,1646.1 1850.19,1796.15 1850.19,1808 1873.29,1831.1 JP1.17
CS3: JP1.18 U1.26 | length 1024.8
  Top w10: U1.26 1220.47,1515.59 1351.32,1646.44 1641.56,1646.44 1656.22,1661.1 1693.93,1661.1 1764.56,1731.73 1764.56,1835.9 1859.76,1931.1 JP1.18
CS4: JP1.19 U1.27 | length 1436.1
  Top w10: U1.27 1200.79,1838.29 v2(1225,1862.5)
  Bottom w10: v2(1225,1862.5) 1225,2020.6 1391.9,2187.5 1687.5,2187.5 1830.01,2044.99 1832.34,2044.99 1846.23,2031.1 JP1.19
CS5: JP1.20 U1.28 | length 1465.8
  Top w10: U1.28 1181.1,1900.29 1187.5,1906.68 v2(1187.5,1912.5)
  Bottom w10: v2(1187.5,1912.5) 1187.5,2037.5 1375,2225 1795.86,2225 JP1.20
GND: C1.2 C2.2 C3.2 C4.2 C5.2 C6.2 C7.2 C8.2 C9.2 C10.2 C11.2 C12.2 JP1.4 MICRO_SD.6 MICRO_SD.MP1 MICRO_SD.MP2 MICRO_SD.MP3 MICRO_SD.MP4 P1.4 Q1.1 R1.1 TP5.1 U1.12 U1.18 U1.31 U1.47 U1.63 Y1.4 Y2.1 Y2.2 Y2.3 | length 3881.6
  Top w10: v1(750,1000) 813.33,1000 860.83,1047.5 861.45,1047.5 867.9,1053.95 C4.2 939.47,1053.95 950.22,1043.2 950.22,1043.11 956.07,1037.26 1021.31,1037.26 U1.47 ; U1.31 1122.05,1467.52 C5.2 ; U1.63 1378.3,936.17 1378.3,907.58 1395.47,890.4 C3.2 ; U1.18 1377.95,1458.38 C6.2@1392.03,1472.45 ; U1.12 1535.97,1233.76 1575,1194.73 C9.2
  Top w20: v1(350,600) 353.11,600 374.37,578.74 MICRO_SD.MP1 ; v1(648.44,562.5) 648.44,565.61 652.03,569.19 652.03,605.43 MICRO_SD.6 ; v1(931.02,942.43) 933.22,940.23 933.22,897.16 936.28,894.1 936.28,880.75 C10.2 942.03,830.64 987.5,785.17 C11.2 987.5,739.83 1062.56,664.78 MICRO_SD.MP4 1079.98,596.16 R1.1 ; MICRO_SD.MP3 1096.22,200 v1(1150,200) ; v2(1547.3,1098.57) 1547.3,1097.99 1562.5,1082.79 C2.2 ; v1(1561.09,664.62) 1561.09,743.01 C1.2 ; C7.2 1723.71,1379.53 1741.98,1397.8 1747.8,1397.8 v1(1750,1400) ; v1(1700,700) 1696.6,703.4 1696.6,772.09 Y2.1 Y2.2 Y2.3
  Top w25: C5.2 1129.53,1565.27 1150,1585.74 v2(1150,1587.5) ; C6.2 1404.53,1473.03 1450,1427.56 1450,1425.88 v1@1450,1425 ; C9.2@1576.52,1193.38 1660.98,1193.38 C8.2 1664.47,1194.89 1723.71,1254.13 1723.71,1379.53
  Bottom w20: 1425,1425.88 1425,1337.5 1547.3,1215.2 v2(1547.3,1098.57)
  Bottom w25: v2(1150,1587.5) 1311.62,1425.88 1425,1425.88 1450,1425.88 1722.36,1425.88 1748.24,1400 v1(1750,1400) ; C12.2 1585.17,747.83 1605.2,727.79 1605.2,632.3 1706.4,531.1 JP1.4
  other v1: 200,100 300,100 400,100 500,100 600,100 700,100 800,100 900,100 1000,100 1100,100 1200,100 1300,100 1400,100 1500,100 1600,100 1700,100 1800,100 1900,100 150,200 350,200 650,200 750,200 850,200 950,200 1250,200 1350,200 1450,200 1550,200 100,300 200,300 400,300 500,300 600,300 700,300 800,300 900,300 1000,300 1100,300 1200,300 1300,300 1400,300 1500,300 1600,300 1700,300 1800,300 2000,300 150,400 350,400 450,400 1150,400 1250,400 1550,400 1650,400 1750,400 2050,400 971.02,442.75 100,500 200,500 400,500 500,500 1200,500 1300,500 1500,500 1600,500 1700,500 1800,500 2000,500 150,600 2050,600 1125,662.5 100,700 200,700 400,700 1400,700 1800,700 2000,700 580.51,769.5 150,800 750,800 100,900 200,900 700,900 1000,937.5 150,1000 350,1000 1323.46,1032 100,1100 200,1100 1300,1100.75 150,1200 350,1200 1237.5,1262.5 1325,1287.5 100,1300 200,1300 500,1300 600,1300 700,1300 800,1300 1800,1300 1614.69,1302.96 150,1400 350,1400 450,1400 550,1400 650,1400 950,1400 2050,1400 1450,1412.5 100,1500 200,1500 400,1500 500,1500 600,1500 700,1500 800,1500 2000,1500 150,1600 350,1600 450,1600 550,1600 650,1600 850,1600 1750,1600 2050,1600 100,1700 200,1700 400,1700 500,1700 800,1700 2000,1700 150,1800 350,1800 450,1800 550,1800 850,1800 1050,1800 2050,1800 100,1900 200,1900 400,1900 500,1900 800,1900 900,1900 1000,1900 1100,1900 2000,1900 150,2000 350,2000 450,2000 1050,2000 1149.25,2000 100,2100 200,2100 400,2100 500,2100 800,2100 900,2100 1100,2100 2100,2100 250,2200 350,2200 450,2200 850,2200 1150,2200 1250,2200 200,2300 300,2300 400,2300 500,2300 700,2300 800,2300 900,2300 1000,2300 1100,2300 1200,2300 1300,2300 1400,2300 1500,2300 1600,2300 1700,2300 1800,2300 1900,2300
IGN1_1: JP2.1 U1.62 | length 1550.5
  Top w10: U1.62 1358.27,841.73 1365.75,834.25 1365.75,812.54 1400,778.29 v2(1400,775)
  Bottom w10: JP2.1 893.6,231.1 1400,737.5 v2(1400,775)
IGN1_2: JP2.2 U1.61 | length 1420
  Top w10: U1.61 1338.58,888.45 1342.22,884.81 1342.22,821.93 1350.75,813.4 1350.75,775.75 v2@1350,775
  Bottom w10: JP2.2 918.6,331.1 v2(1350,762.5)
IGN2_1: JP2.3 U1.57 | length 1216.5
  Top w10: v2(1225,862.5) 1259.5,897 1259.5,936.17 U1.57
  Bottom w10: JP2.3 484.21,431.1 522.38,469.27 831.77,469.27 v2(1225,862.5)
IGN2_2: JP2.4 U1.52 | length 1123.6
  Top w10: U1.52 1161.76,936.17 1161.76,885.75 1170.89,876.63 1170.89,854.11 v2(1175,850)
  Bottom w10: JP2.4 856.1,531.1 v2(1175,850)
IGN3_1: JP2.5 U1.51 | length 1025.8
  Top w10: v2(1137.5,875.75) 1141.39,879.63 1141.39,936.17 U1.51
  Bottom w10: JP2.5 892.85,631.1 v2(1137.5,875.75)
IGN3_2: JP2.6 U1.44 | length 897.2
  Top w10: JP2.6 299.28,731.1 664.14,1095.96 U1.44
IGN_CHK1: JP2.7 U1.43 | length 892.4
  Top w10: JP2.7 284.65,840.16 340.16,840.16 650,1150 912.5,1150 946.85,1115.65 U1.43
IGN_CHK2: JP2.8 U1.42 | length 873.9
  Top w10: JP2.8 372.2,931.1 628.6,1187.5 912.5,1187.5 964.67,1135.33 U1.42
IGN_CHK3: JP2.9 U1.41 | length 855.4
  Top w10: JP2.9 318.6,1031.1 512.5,1225 912.5,1225 982.48,1155.02 U1.41
LIPO: JP1.3
MISO: JP1.13 U1.22 | length 783.2
  Top w10: U1.22 1299.21,1509.48 1352.23,1562.5 1398.32,1562.5 v2(1400,1560.82)
  Bottom w10: v2(1400,1560.82) 1401.68,1560.82 1475,1487.5 1800,1487.5 1856.4,1431.1 JP1.13
MISO2: MICRO_SD.7 R4.1 TP8.1 U1.10 | length 2093.3
  Top w10: R4.1 527.85,740.54 615.44,652.94 ; MICRO_SD.7 615.44,612.15 615.44,652.94 ; v2(637.5,737.5) 662.5,712.5 662.5,700 ; v2(725,700) 662.5,700 ; v1(1125,1137.5) 1162.5,1137.5 1219.39,1194.39 U1.10 ; 615.44,652.94 662.5,700
  Bottom w10: TP8.1 638.25,1088.42 638.25,738.25 v2(637.5,737.5) ; v2(725,700) 1125,1100 v1(1125,1137.5)
MOSI: JP1.14 U1.23 | length 785.7
  Top w10: U1.23 1279.53,1511.01 1355.09,1586.57 1431.74,1586.57 1450,1568.32 v2(1450,1562.5)
  Bottom w10: v2(1450,1562.5) 1481.4,1531.1 JP1.14
MOSI2: MICRO_SD.3 R4.3 TP7.1 U1.11 | length 1826.7
  Top w10: R4.3 592.42,807.58 v2(612.5,787.5) 637.5,787.5 687.58,737.42 737.58,737.42 v2(787.5,687.5) 786.61,686.61 786.61,610.09 MICRO_SD.3 ; v1(1150,1187.5) 1176.57,1214.07 U1.11
  Bottom w10: TP7.1 487.5,1112.5 487.5,912.5 v2(612.5,787.5) ; v2(787.5,687.5) 1150.75,1050.75 1150.75,1186.75 v1(1150,1187.5)
NetC7_1: C7.1 C8.1 C9.1 L1.2 U1.13 | length 344.3
  Top w10: U1.13 1571.47,1253.44 C9.1
  Top w25: L1.2 C9.1 1576.52,1255.46 1660.98,1255.46 C8.1 C7.1
NetLS_1: LS.1 Q1.3 R3.1 | length 511.2
  Top w25: LS.1 1414.07,1928.26 1626.83,1715.51 1667.97,1715.51 R3.1
NetQ1_2: Q1.2 R2.2 | length 151
  Top w25: R2.2@1400,1687.5 1401.24,1688.74 1548.76,1688.74 Q1.2
NetR1_2: R1.2 TP9.1 U1.60 | length 364.8
  Top w10: TP9.1 1207.77,683.57 R1.2 ; U1.60 1318.9,886.92 1325,880.82 v2(1325,800)
  Bottom w10: TP9.1 1300,775 v2(1325,800)
NetR5_2: R5.2 U1.14 | length 929.6
  Top w10: U1.14 1504.43,1273.13 1509.71,1278.41 1509.9,1278.41 1531.84,1300.35 1531.84,1355.66 v2(1500,1387.5) ; v2(2050,1075) 2050,1121.8 R5.2
  Bottom w10: v2(1500,1387.5) 1582.63,1387.5 1803.25,1166.88 1803.25,1109.25 1837.5,1075 v2(2050,1075)
NetR6_2: R6.2 U1.15 | length 970.5
  Top w10: v2(1474.94,1349.99) 1479.04,1345.89 1490.92,1345.89 1518.34,1318.47 1518.34,1306.53 1509.9,1298.09 1509.71,1298.09 1504.43,1292.81 U1.15 ; v2(2050,975) 2050,1021.8 R6.2
  Bottom w10: v2(1474.94,1349.99) 1475.01,1349.99 1547.79,1277.21 1671.7,1277.21 1775,1173.91 1775,1025 1825,975 v2@2037.5,975
NetR7_2: R7.2 U1.53 | length 1052.2
  Top w10: v2(1175,1012.5) 1181.1,1006.4 U1.53 ; v2(1737.5,1137.5) 1775,1137.5 1812.5,1175 2007.13,1175 2053.2,1221.06 R7.2
  Bottom w10: v2(1175,1012.5) 1254.35,1012.5 1260.59,1006.26 1606.26,1006.26 v2(1737.5,1137.5)
NetR8_1: R8.1 U1.54 | length 1109.4
  Top w10: v2(1200,1075) 1200,1070.89 1212.5,1058.39 1212.5,1012.5 1200.79,1000.79 U1.54 ; v2(1712.5,1175) 1737.5,1175 1837.5,1275 2007.13,1275 2053.2,1321.06 R8.1
  Bottom w10: v2(1200,1075) 1202.17,1072.83 1610.33,1072.83 v2(1712.5,1175)
NetR9_2: R9.2 U1.8 | length 703.5
  Top w10: U1.8 1533.76,1155.02 1626.28,1062.5 1650,1062.5 1825,887.5 2019.63,887.5 2053.2,921.06 R9.2
NetR10_2: R10.2 U1.9 | length 900.5
  Top w10: U1.9 1535.29,1174.7 1603.89,1106.1 1693.9,1106.1 1737.5,1062.5 v2(1737.5,1037.5) ; v2(2050,775) 2050,821.8 R10.2
  Bottom w10: v2(1737.5,1037.5) 1737.5,850 1812.5,775 v2@2037.5,775
NRST: P1.2 U1.7 | length 1552.8
  Top w10: v1@1325,1137.5 1327.17,1135.33 U1.7
  Bottom w10: P1.2 675,1737.5 1275,1137.5 v1(1312.5,1137.5)
OSC: TP2.1 U1.5 Y1.5 | length 1018.6
  Top w10: Y1.5 900,1662.5 TP2.1 ; v1(1400,1100) 1403.69,1096.31 1478,1096.31 U1.5
  Bottom w10: TP2.1 1065.05,1659.95 1065.05,1622.45 1425,1262.5 1425,1125 v1(1400,1100)
OSC32: TP1.1 U1.3 Y2.5 | length 681.6
  Top w10: U1.3 1478,1056.25 1431.25,1056.25 1425,1050 1425,1012.5 1498.16,939.34 1598.16,939.34 1669.46,868.04 Y2.5 1693.2,843.2 1650,800 1650,705.47 1697.32,658.15 TP1.1
RX1: JP1.7 R10.1 | length 106.9
  Top w10: JP1.7 1988.04,831.1 R10.1
RX2: JP1.9 R6.1 | length 136.9
  Top w10: JP1.9@1859.76,1031.1 JP1.9 1988.04,1031.1 R6.1
RX3: JP1.11 R7.1 | length 136.9
  Top w10: JP1.11 1988.04,1231.1 R7.1
  Bottom w10: JP1.11@1859.76,1231.1 JP1.11
SCK: JP1.15 U1.21 | length 755.3
  Top w10: U1.21 1318.9,1507.95 1345.95,1535 1485.81,1535 1508.31,1512.5 1608.97,1512.5 1727.57,1631.1 JP1.15
SCK2: MICRO_SD.5 R4.2 TP6.1 U1.29 | length 1691.5
  Top w10: R4.2 560.93,802.42 550,791.49 550,750 595.89,704.11 608.39,704.11 v2(612.5,700) ; v2(687.13,674.25) 687.13,668.43 702.06,653.5 702.06,612.15 MICRO_SD.5 ; v1(1113.25,1225) 1113.25,1225.75 1161.42,1273.92 U1.29
  Bottom w10: TP6.1 412.5,900 v2(612.5,700) 638.25,674.25 v2(687.13,674.25) ; v2@687.5,675 687.13,675.37 687.13,798.88 v1(1113.25,1225)
SCL0: JP1.5 U1.58 | length 940.8
  Top w10: U1.58 1279.53,720.47 1462.5,537.5 1796.16,537.5 JP1.5
SD_CS: MICRO_SD.2 R4.4 | length 346.4
  Top w10: R4.4 625.49,832.33 632.42,825.4 637.59,825.4 710.57,752.42 759,752.42 831.98,679.43 831.98,612.15 MICRO_SD.2
SDA0: JP1.6 U1.59 | length 918.3
  Top w10: U1.59 1299.21,750.79 1475,575 1725,575 1850.19,700.19 1850.19,708 1873.29,731.1 JP1.6
SWCLK: P1.5 U1.49 | length 1467.2
  Top w10: P1.5 975,1967.73 1162.5,1780.23 1162.5,1667 1046.22,1550.73 1046.22,1437.5 1087.5,1396.22 1087.5,968.52 1093.57,962.45 1101.53,962.45 1102.36,961.62 U1.49
SWDIO: P1.3 U1.46 | length 1473.9
  Top w10: v2(737.5,1287.5) 737.5,2212.5 P1.3 ; v2(800,1062.5) 855.24,1062.5 872.44,1079.69 959.36,1079.69 965.22,1073.84 965.22,1062.45 971.07,1056.59 U1.46
  Bottom w10: v2(737.5,1287.5) 737.5,1125 v2(800,1062.5)
SWO: P1.1 U1.55 | length 1609.6
  Top w10: v1(1187.5,1112.5) 1212.5,1112.5 1237.5,1087.5 1237.5,1000 1220.47,982.97 U1.55
  Bottom w10: P1.1 612.5,2212.5 612.5,1775 1187.5,1200 v1(1187.5,1112.5)
TX1: JP1.8 R9.1 | length 106.9
  Top w10: JP1.8 1988.04,931.1 R9.1
TX2: JP1.10 R5.1 | length 146.9
  Top w10: JP1.10@1849.72,1131.1 JP1.10 1988.04,1131.1 R5.1
TX3: JP1.12 R8.2 | length 106.9
  Top w10: JP1.12 1988.04,1331.1 R8.2
VCC: C1.1 C2.1 C3.1 C4.1 C5.1 C6.1 C10.1 C11.1 C12.1 L1.1 L2.2 MICRO_SD.1 MICRO_SD.4 MICRO_SD.8 P1.6 R4.5 R4.6 R4.7 R4.8 TP4.1 U1.1 U1.19 U1.32 U1.48 U1.64 Y1.8 Y2.4 | length 6117.2
  Top w10: C4.1@939.47,994.89 950.22,1005.64 950.22,1007.61 959.83,1017.22 U1.48 ; C5.1 1070.47,1473.03 1081.22,1462.28 1083.19,1462.28 1102.36,1443.11 1102.36,1367.13 1107.64,1361.85 1107.64,1361.65 1116.65,1352.64 1116.65,1351.66 1125,1343.32 v1(1125,1337.5) ; v1(1250,1337.5) 1337.5,1337.5 1358.16,1358.16 1358.16,1393.1 U1.19 1358.27,1456.43 1356.22,1458.47 1356.22,1464.25 C6.1 ; U1.64 U1.64@1397.64,925.84 ; C3.1 1454.53,859.66 1403.6,910.58 1398.47,910.58 1397.64,911.42 U1.64@1397.64,925.84 ; v2(1462.5,925) 1398.47,925 U1.64@1397.64,925.84 ; U1.1 1538.2,1017.22 C2.1@1560.53,994.89
  Top w25: R4.5 R4.6 R4.7 R4.8 527.36,906.69 506.69,906.69 475,875 475,737.5 567.91,644.59 567.91,610.48 MICRO_SD.8 570.47,607.93 570.47,554.53 625,500 750,500 ; MICRO_SD.4 742.42,507.58 750,500 ; v2(850,1475) 850,1537.5 938.38,1625.88 v2(975,1625.88) ; v2(875,1025) 903.06,996.94 919.89,996.94 933.48,996.94 C4.1@935.53,994.89 ; C4.1@919.89,994.89 884.74,959.74 884.74,876.76 C10.1 883.06,874.91 883.06,762.59 C11.1 873.62,752.97 873.62,610.48 MICRO_SD.1 872.34,559.84 ; C5.1 1070.47,1531.21 1075,1535.74 v2(1075,1537.5) ; C6.1 1348.72,1478.25 1348.72,1480.22 1381,1512.5 1437.5,1512.5 1548.71,1401.29 1574.7,1401.29 L1.1 ; C3.1 C3.1@1454.53,856.48 ; L2.2 v2(1462.5,500) 1387.5,500 TP4.1 1162.5,550 1125,512.5 919.68,512.5 872.34,559.84 ; v2(1462.5,650) 1462.5,789.26 1454.53,797.23 C3.1@1454.53,856.48 ; v2(1462.5,925) v2@1463.61,925 ; C1.1@1539.83,848.78 C1.1 1558.05,853.23 1457.78,853.23 C3.1@1454.53,856.48 ; C2.1@1560.53,994.89 C2.1 1662.75,994.89 1691.32,966.32 ; v2(1666.82,941.82) 1691.32,966.32 ; Y2.4 1768,889.64 1691.32,966.32 ; 750,500 812.5,500 872.34,559.84
  Bottom w10: v1(1125,1337.5) v1(1250,1337.5)
  Bottom w25: v2(850,1475) 850,1257.94 875,1232.94 v2(875,1025) ; v2(1075,1537.5) 970.29,1642.21 970.29,1779.71 862.5,1887.5 Y1.8 1067.73,2205.23 1067.73,2242.73 P1.6 ; v2(1462.5,500) v2(1462.5,650) ; v2(1462.5,925) 1562.5,925 ; C12.1 1562.5,925 ; v2(1666.82,941.82) 1665.06,941.82 1648.24,925 1562.5,925
pads on no net: JP2.10 JP2.11 JP2.12 JP2.13 JP2.14 JP2.15 JP2.16 JP2.17 JP2.18 JP2.19 JP2.20 MICRO_SD. MICRO_SD.CD1 U1.2 U1.4 U1.6 U1.16 U1.17 U1.20 U1.30 U1.33 U1.34 U1.35 U1.37 U1.38 U1.39 U1.40 U1.45 U1.50 U1.56 Y1.1

## Polygon pours and split planes (outlines as drawn)
GND on Bottom "GND_L02_P002" (solid, remove dead copper, pour order 2): 0,2362.5 0,0 2162.5,0 2162.5,2362.5
GND on Top "GND_L01_P001" (solid, remove dead copper, pour order 1): 0,2362.5 0,0 2162.5,0 2162.5,2362.5

## Keep-outs
Keep-Out Layer:
  the board outline again, w0

## Other copper
Top:
  region: 1300,1312.5
  region: 1300,1312.5
  region: 1300,1312.5
  region: 1300,1312.5
  region: 1300,1312.5
  region: 1300,1312.5

## Silkscreen, mask and mechanical layers (free items; w line width, h text height)
Top Overlay:
  drawing of 34 lines, arcs and shapes, not listed

## Text inside footprints (layer, text, board x,y; h text height)
P1: Top Overlay "1" at 562.5,2137.5 h40; Top Overlay "6" at 1062.5,2137.5 h40